# EAGLE board 10x10_rescaled (EAGLE 6.2)

Size 63.25 x 63.25 mm. Coordinates in mm from the lower left corner, seen from the top.
Outline: 0,0 0,63.25 63.25,63.25 63.25,0 0,0
Copper layers (1*16): Top 0.035mm / dielectric 1.5mm / Bottom 0.035mm
Design rules: minimum track width 10mil, minimum drill 24mil, track to track 8mil, track to pad 8mil, pad to pad 8mil, via to via 8mil, smd to smd 8mil, copper to edge 40mil, drill to drill 8mil, minimum pad ring 10mil, minimum via ring 8mil, stop-mask expansion 4mil, vias tented up to drill 0mil, thermal gap 10mil
Holes 3.2 mm at 6.32,6.32 6.32,56.92 56.92,6.32 56.92,56.92

## Footprints (pad centres in the part's own frame; a part is rotated, then mirrored left to right if it is on the bottom)
LED3MM = drill 0.813 pad 1.88: A -1.27,0; K 1.27,0
1X01 = drill 1.016 pad 1.88: 1 0,0
1X11_LOCK = drill 1.016 pad 1.88: 1 0,0.127; 2 2.54,-0.127; 3 5.08,0.127; 4 7.62,-0.127; 5 10.16,0.127; 6 12.7,-0.127; 7 15.24,0.127; 8 17.78,-0.127; 9 20.32,0.127; 10 22.86,-0.127; 11 25.4,0.127

## Placement (x,y rotation side)
00  [LED3MM]  3.16,3.16 0 top
01  [LED3MM]  9.49,3.16 0 top
02  [LED3MM]  15.81,3.16 0 top
03  [LED3MM]  22.14,3.16 0 top
04  [LED3MM]  28.46,3.16 0 top
05  [LED3MM]  34.79,3.16 0 top
06  [LED3MM]  41.11,3.16 0 top
07  [LED3MM]  47.43,3.16 0 top
08  [LED3MM]  53.76,3.16 0 top
09  [LED3MM]  60.08,3.16 0 top
10  [LED3MM]  3.16,9.49 0 top
11  [LED3MM]  9.49,9.49 0 top
12  [LED3MM]  15.81,9.49 0 top
13  [LED3MM]  22.14,9.49 0 top
14  [LED3MM]  28.46,9.49 0 top
15  [LED3MM]  34.79,9.49 0 top
16  [LED3MM]  41.11,9.49 0 top
17  [LED3MM]  47.43,9.49 0 top
18  [LED3MM]  53.76,9.49 0 top
19  [LED3MM]  60.08,9.49 0 top
20  [LED3MM]  3.16,15.81 0 top
21  [LED3MM]  9.49,15.81 0 top
22  [LED3MM]  15.81,15.81 0 top
23  [LED3MM]  22.14,15.81 0 top
24  [LED3MM]  28.46,15.81 0 top
25  [LED3MM]  34.79,15.81 0 top
26  [LED3MM]  41.11,15.81 0 top
27  [LED3MM]  47.43,15.81 0 top
28  [LED3MM]  53.76,15.81 0 top
29  [LED3MM]  60.08,15.81 0 top
30  [LED3MM]  3.16,22.14 0 top
31  [LED3MM]  9.49,22.14 0 top
32  [LED3MM]  15.81,22.14 0 top
33  [LED3MM]  22.14,22.14 0 top
34  [LED3MM]  28.46,22.14 0 top
35  [LED3MM]  34.79,22.14 0 top
36  [LED3MM]  41.11,22.14 0 top
37  [LED3MM]  47.43,22.14 0 top
38  [LED3MM]  53.76,22.14 0 top
39  [LED3MM]  60.08,22.14 0 top
40  [LED3MM]  3.16,28.46 0 top
41  [LED3MM]  9.49,28.46 0 top
42  [LED3MM]  15.81,28.46 0 top
43  [LED3MM]  22.14,28.46 0 top
44  [LED3MM]  28.46,28.46 0 top
45  [LED3MM]  34.79,28.46 0 top
46  [LED3MM]  41.11,28.46 0 top
47  [LED3MM]  47.43,28.46 0 top
48  [LED3MM]  53.76,28.46 0 top
49  [LED3MM]  60.08,28.46 0 top
50  [LED3MM]  3.16,34.79 0 top
51  [LED3MM]  9.49,34.79 0 top
52  [LED3MM]  15.81,34.79 0 top
53  [LED3MM]  22.14,34.79 0 top
54  [LED3MM]  28.46,34.79 0 top
55  [LED3MM]  34.79,34.79 0 top
56  [LED3MM]  41.11,34.79 0 top
57  [LED3MM]  47.43,34.79 0 top
58  [LED3MM]  53.76,34.79 0 top
59  [LED3MM]  60.08,34.79 0 top
60  [LED3MM]  3.16,41.11 0 top
61  [LED3MM]  9.49,41.11 0 top
62  [LED3MM]  15.81,41.11 0 top
63  [LED3MM]  22.14,41.11 0 top
64  [LED3MM]  28.46,41.11 0 top
65  [LED3MM]  34.79,41.11 0 top
66  [LED3MM]  41.11,41.11 0 top
67  [LED3MM]  47.43,41.11 0 top
68  [LED3MM]  53.76,41.11 0 top
69  [LED3MM]  60.08,41.11 0 top
70  [LED3MM]  3.16,47.43 0 top
71  [LED3MM]  9.49,47.43 0 top
72  [LED3MM]  15.81,47.43 0 top
73  [LED3MM]  22.14,47.43 0 top
74  [LED3MM]  28.46,47.43 0 top
75  [LED3MM]  34.79,47.43 0 top
76  [LED3MM]  41.11,47.43 0 top
77  [LED3MM]  47.43,47.43 0 top
78  [LED3MM]  53.76,47.43 0 top
79  [LED3MM]  60.08,47.43 0 top
80  [LED3MM]  3.16,53.76 0 top
81  [LED3MM]  9.49,53.76 0 top
82  [LED3MM]  15.81,53.76 0 top
83  [LED3MM]  22.14,53.76 0 top
84  [LED3MM]  28.46,53.76 0 top
85  [LED3MM]  34.79,53.76 0 top
86  [LED3MM]  41.11,53.76 0 top
87  [LED3MM]  47.43,53.76 0 top
88  [LED3MM]  53.76,53.76 0 top
89  [LED3MM]  60.08,53.76 0 top
90  [LED3MM]  3.16,60.08 0 top
91  [LED3MM]  9.49,60.08 0 top
92  [LED3MM]  15.81,60.08 0 top
93  [LED3MM]  22.14,60.08 0 top
94  [LED3MM]  28.46,60.08 0 top
95  [LED3MM]  34.79,60.08 0 top
96  [LED3MM]  41.11,60.08 0 top
97  [LED3MM]  47.43,60.08 0 top
98  [LED3MM]  53.76,60.08 0 top
99  [LED3MM]  60.08,60.08 0 top
H0  [1X01]  18.92,6.32 0 top
H1  [1X01]  21.46,6.32 0 top
H2  [1X01]  24,6.32 0 top
H3  [1X01]  26.54,6.32 0 top
H4  [1X01]  29.08,6.32 0 top
H5  [1X01]  31.62,6.32 0 top
H6  [1X01]  34.16,6.32 0 top
H7  [1X01]  36.7,6.32 0 top
H8  [1X01]  39.24,6.32 0 top
H9  [1X01]  41.78,6.32 0 top
H10  [1X01]  44.32,6.32 0 top
H11  [1X11_LOCK]  19.05,12.7 0 top

## Library data of the parts
00 01-09 10-99 H0 H1-H11 = SparkFun

## Nets
D: 00.A 11.A 22.A 33.A 44.A 55.A 66.A 77.A 88.A 99.A H10.1 H11.11
S0: 00.K 01.A 02.A 03.A 04.A 05.A 06.A 07.A 08.A 09.A 10.K 20.K 30.K 40.K 50.K 60.K 70.K 80.K 90.K H0.1 H11.1
S1: 01.K 10.A 11.K 12.A 13.A 14.A 15.A 16.A 17.A 18.A 19.A 21.K 31.K 41.K 51.K 61.K 71.K 81.K 91.K H1.1 H11.2
S2: 02.K 12.K 20.A 21.A 22.K 23.A 24.A 25.A 26.A 27.A 28.A 29.A 32.K 42.K 52.K 62.K 72.K 82.K 92.K H2.1 H11.3
S3: 03.K 13.K 23.K 30.A 31.A 32.A 33.K 34.A 35.A 36.A 37.A 38.A 39.A 43.K 53.K 63.K 73.K 83.K 93.K H3.1 H11.4
S4: 04.K 14.K 24.K 34.K 40.A 41.A 42.A 43.A 44.K 45.A 46.A 47.A 48.A 49.A 54.K 64.K 74.K 84.K 94.K H4.1 H11.5
S5: 05.K 15.K 25.K 35.K 45.K 50.A 51.A 52.A 53.A 54.A 55.K 56.A 57.A 58.A 59.A 65.K 75.K 85.K 95.K H5.1 H11.6
S6: 06.K 16.K 26.K 36.K 46.K 56.K 60.A 61.A 62.A 63.A 64.A 65.A 66.K 67.A 68.A 69.A 76.K 86.K 96.K H6.1 H11.7
S7: 07.K 17.K 27.K 37.K 47.K 57.K 67.K 70.A 71.A 72.A 73.A 74.A 75.A 76.A 77.K 78.A 79.A 87.K 97.K H7.1 H11.8
S8: 08.K 18.K 28.K 38.K 48.K 58.K 68.K 78.K 80.A 81.A 82.A 83.A 84.A 85.A 86.A 87.A 88.K 89.A 98.K H8.1 H11.9
S9: 09.K 19.K 29.K 39.K 49.K 59.K 69.K 79.K 89.K 90.A 91.A 92.A 93.A 94.A 95.A 96.A 97.A 98.A 99.K H9.1 H11.10

## Tracks (layer width: path | path; a pad name or v marks a point on that pad's centre or on a via)
D  (11 unrouted)
S0  (20 unrouted)
S1  (20 unrouted)
S2  (20 unrouted)
S3  (20 unrouted)
S4  (20 unrouted)
S5  (20 unrouted)
S6  (20 unrouted)
S7  (20 unrouted)
S8  (20 unrouted)
S9  (20 unrouted)